# Altium PCB CPU_PCB.PcbDoc
Units mm, origin at the board's own origin, x right, y up, seen from the top; angles counter-clockwise.
Board outline 42 x 42 mm, 2 copper layers (Top Layer, Bottom Layer); 30 components, 38 nets, 169 pads, 39 vias.
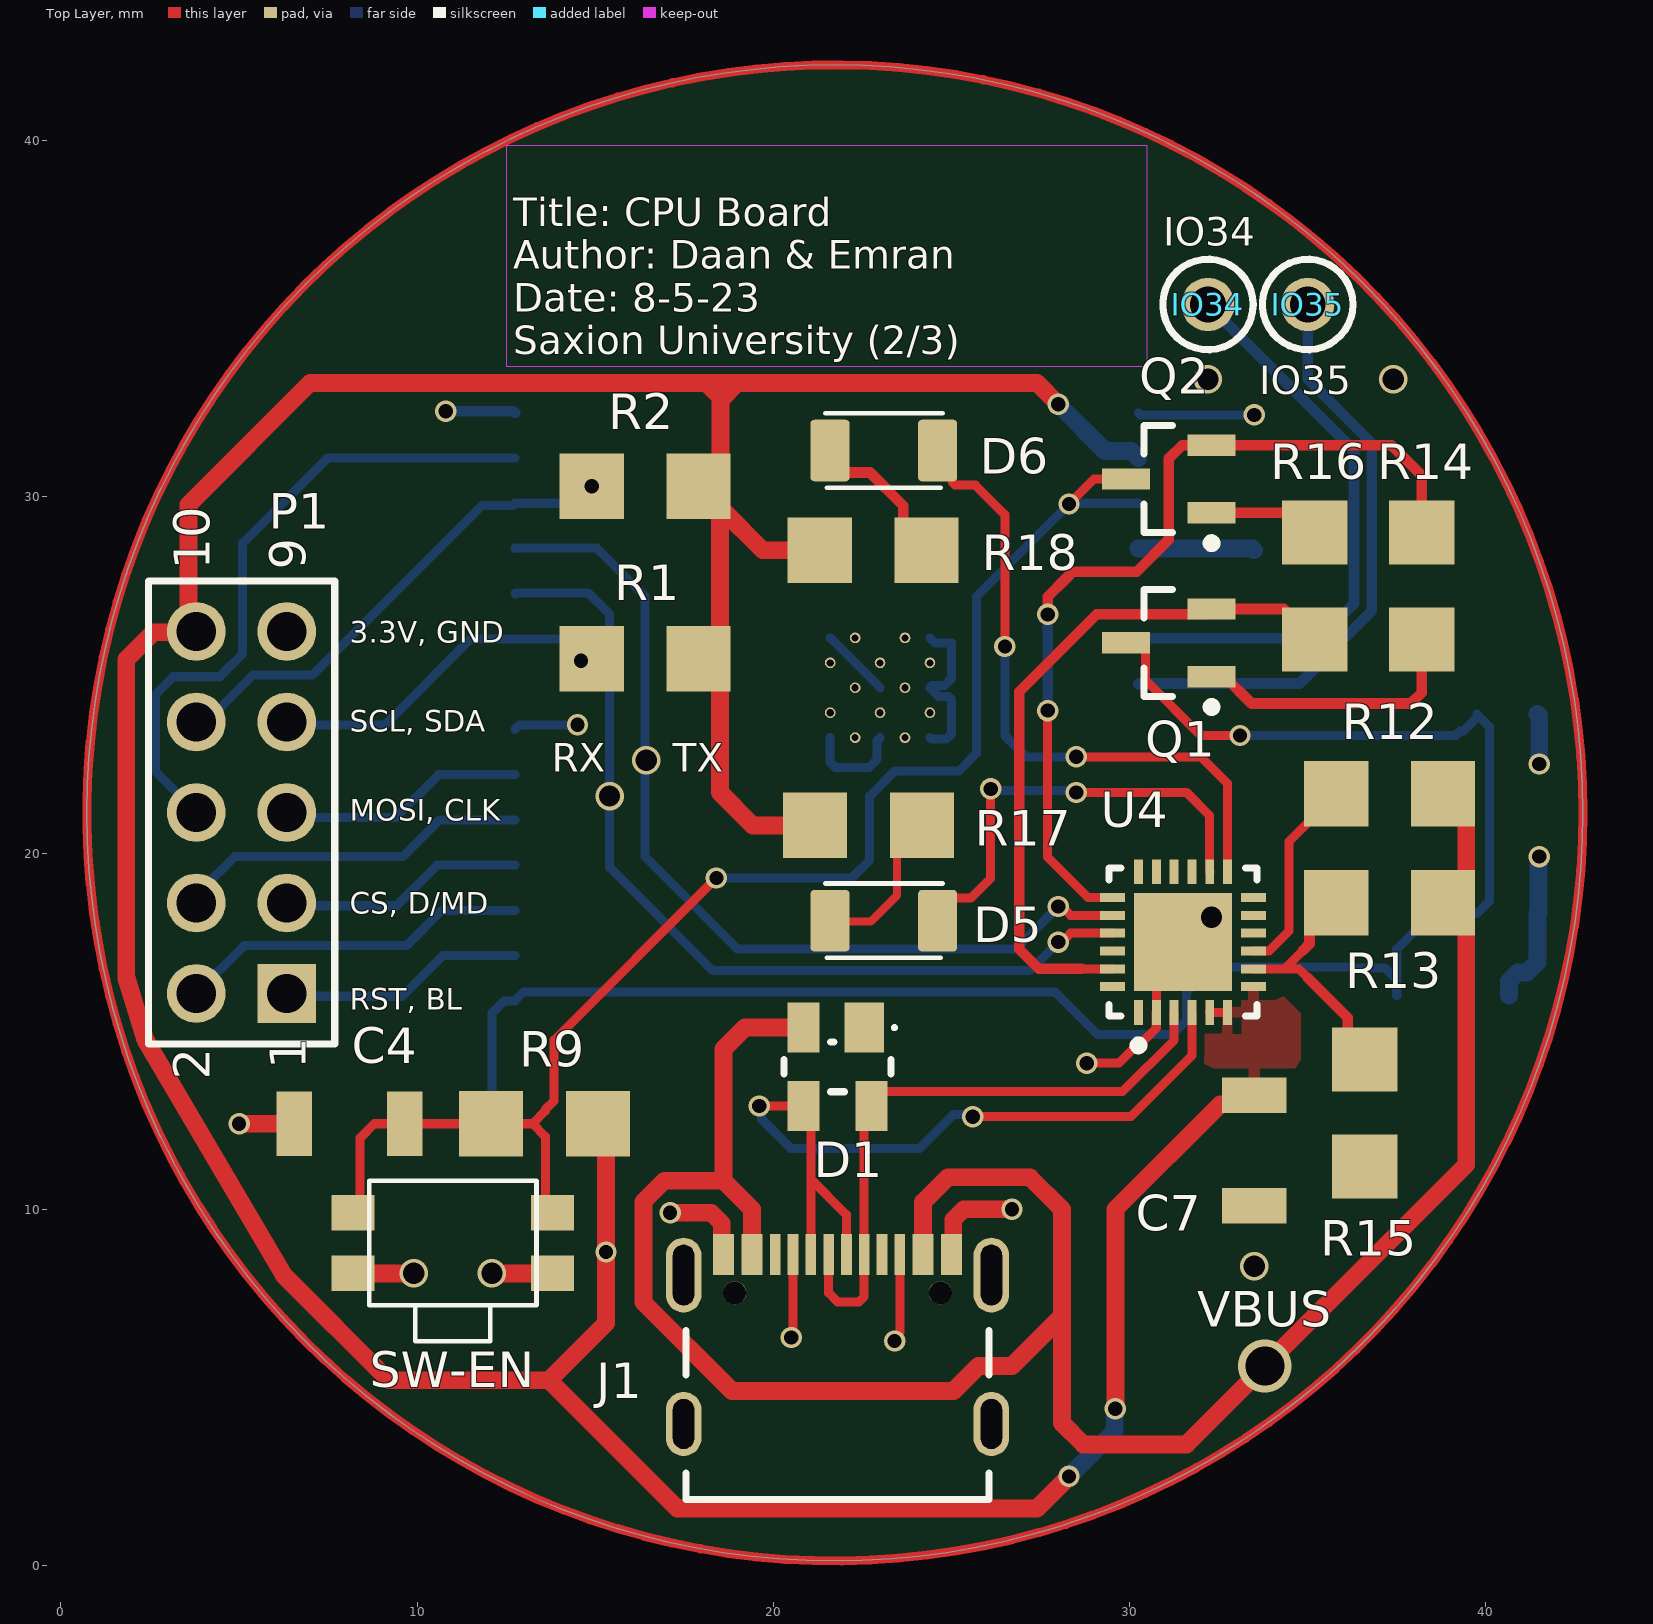
[diagram p0: Top Layer view]
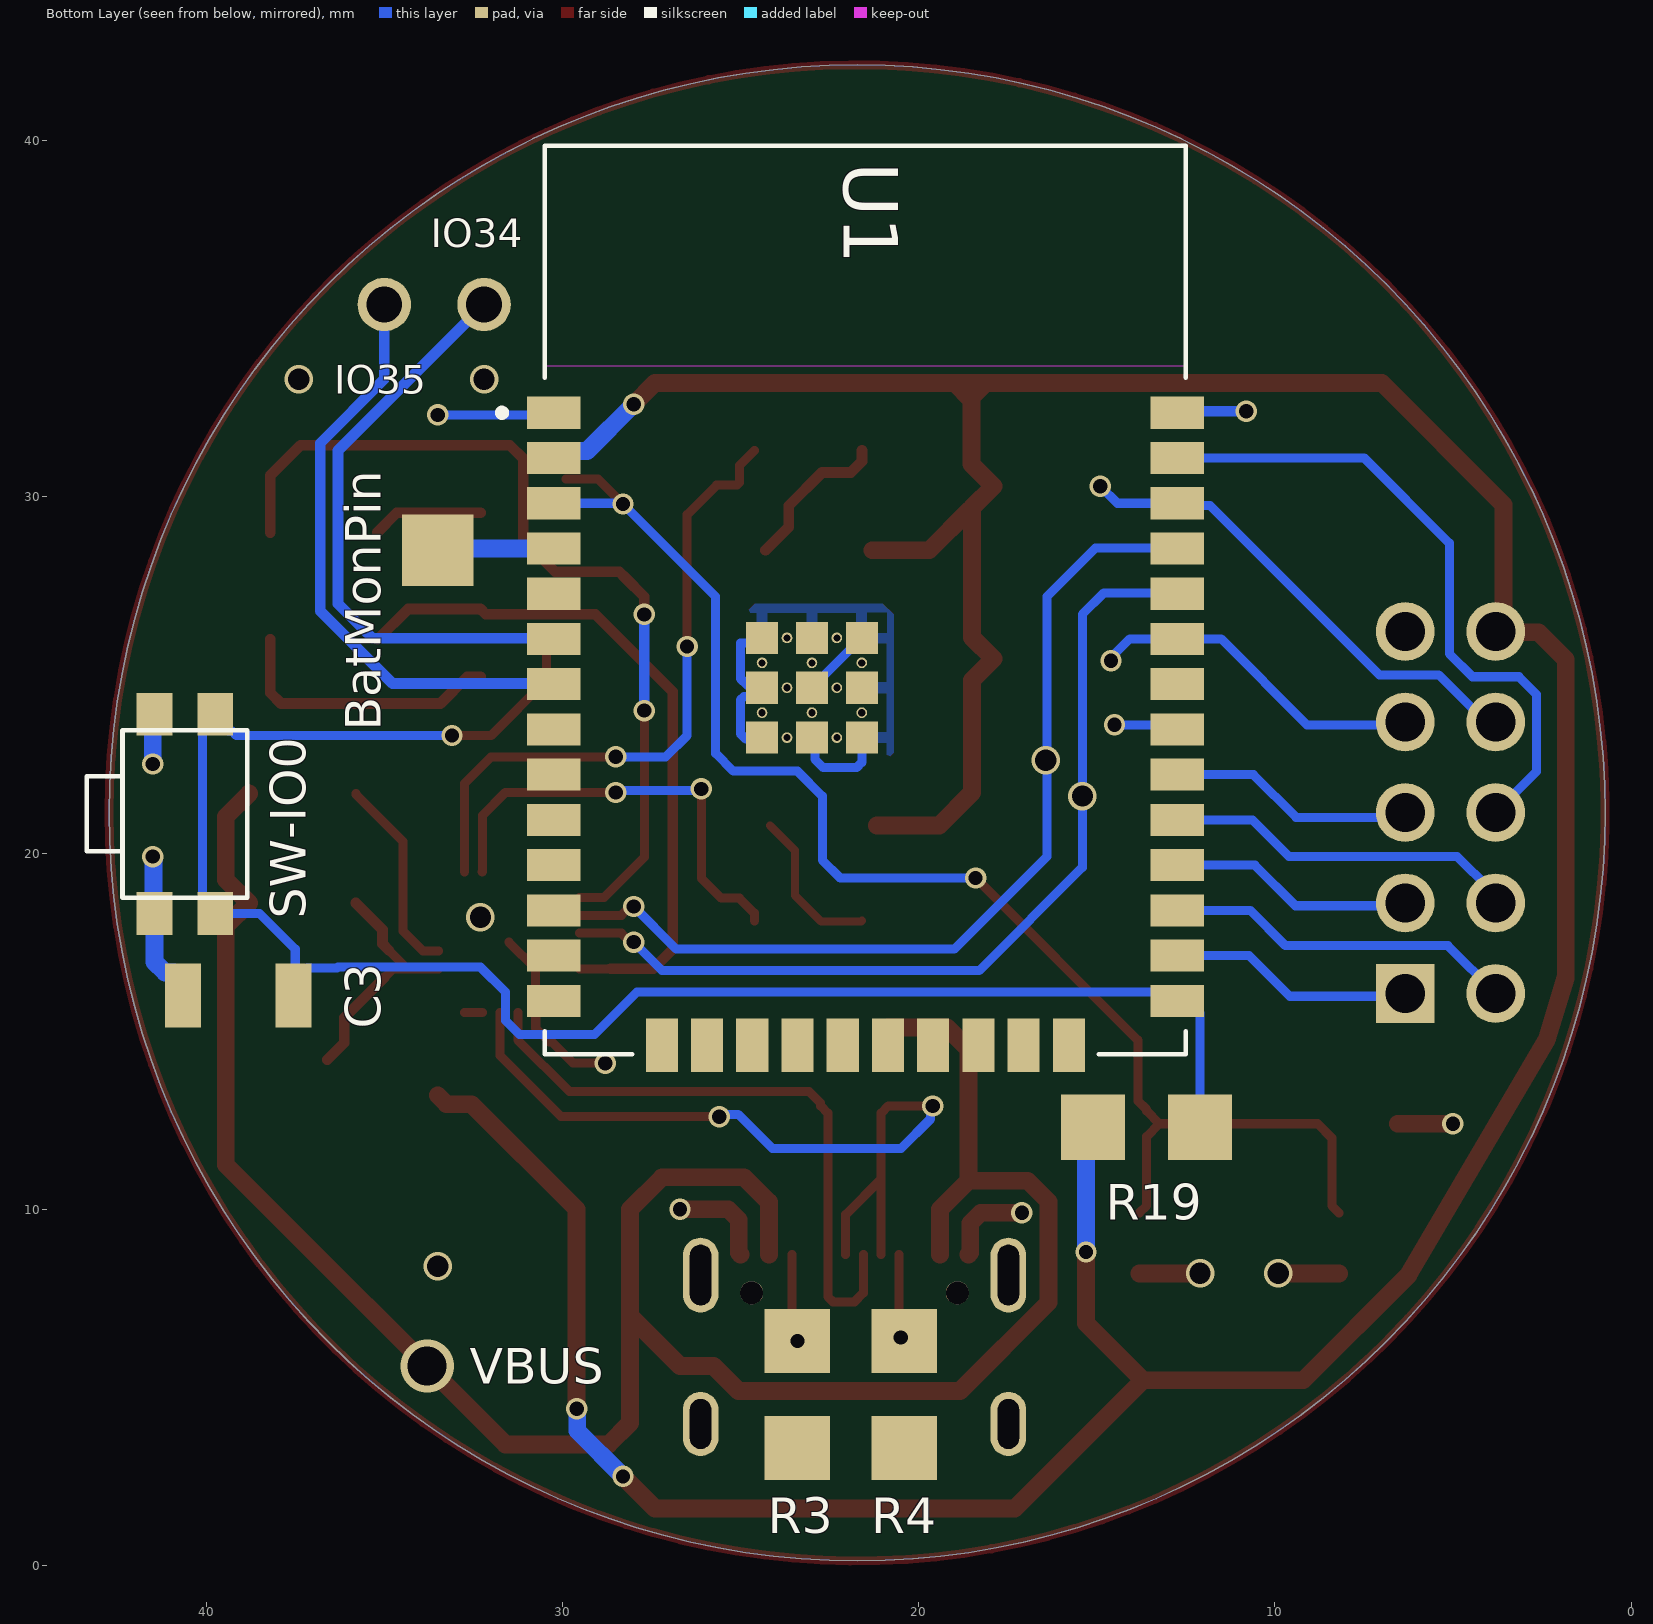
[diagram p1: Bottom Layer view, seen from below]
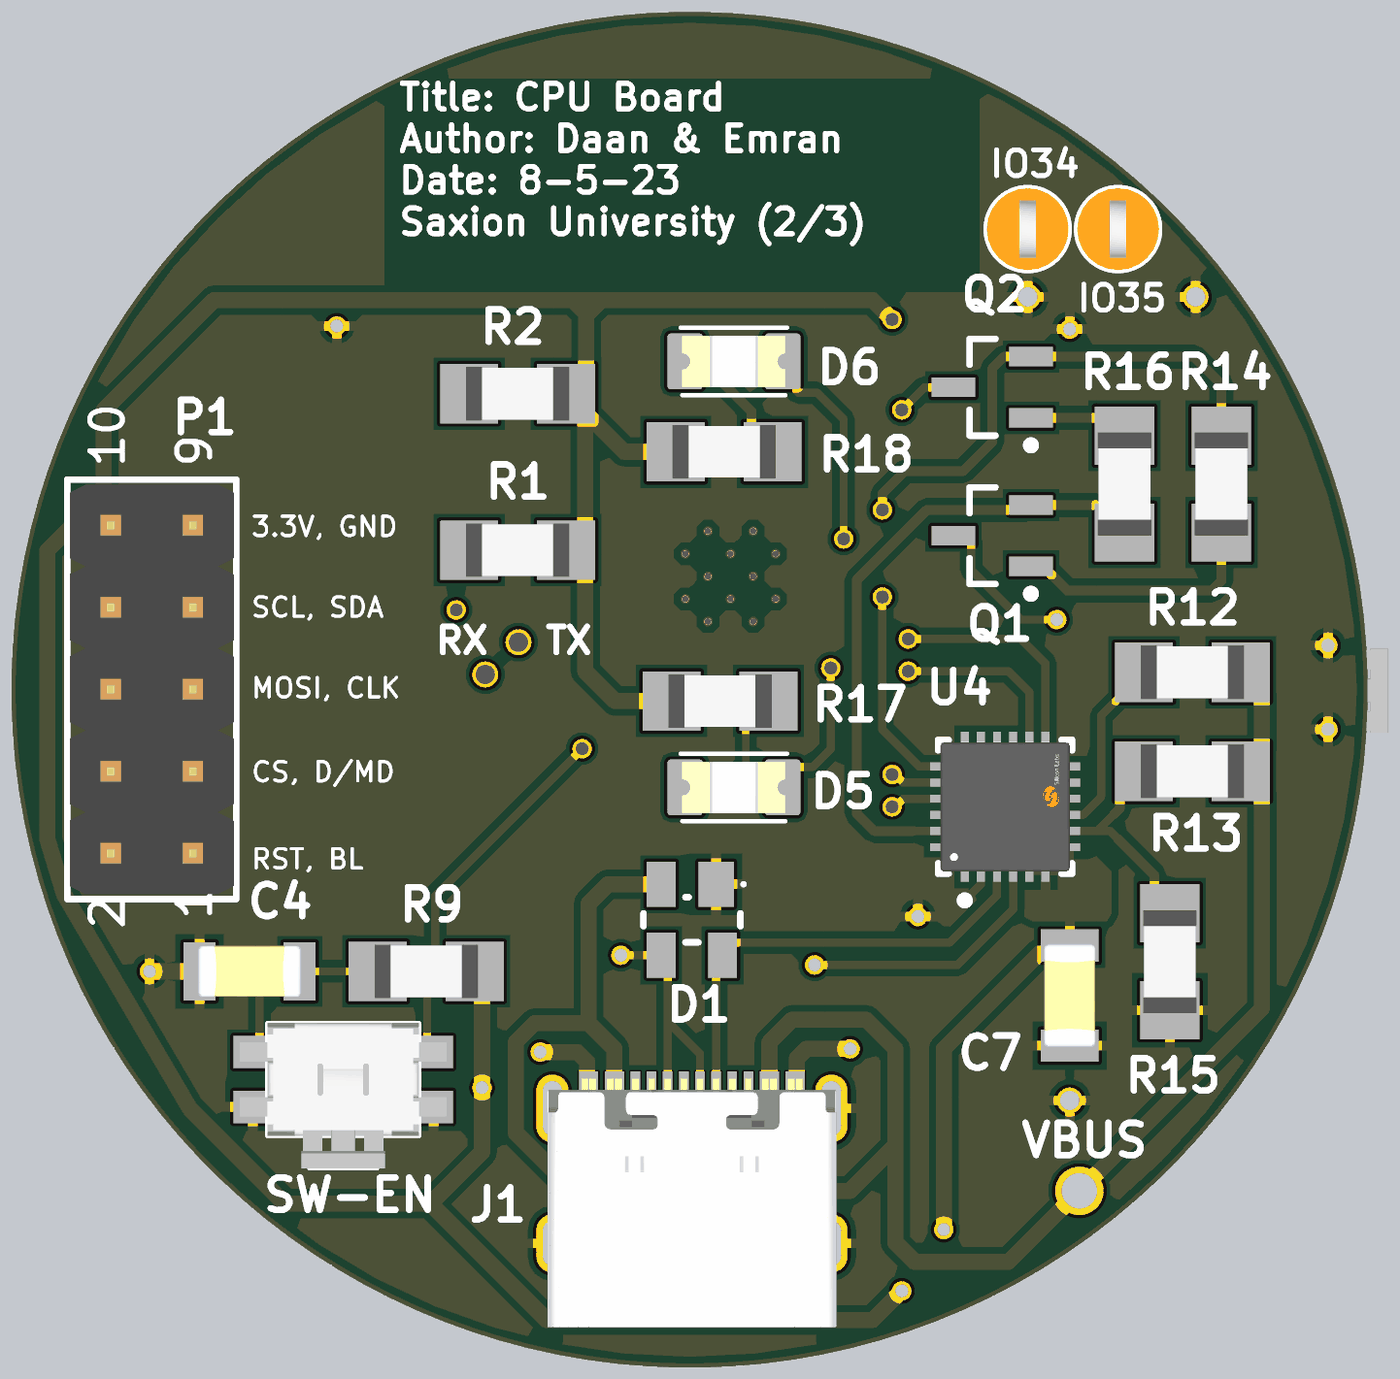
[diagram p2: 3D render of the assembled board from above, using the file's embedded part models]
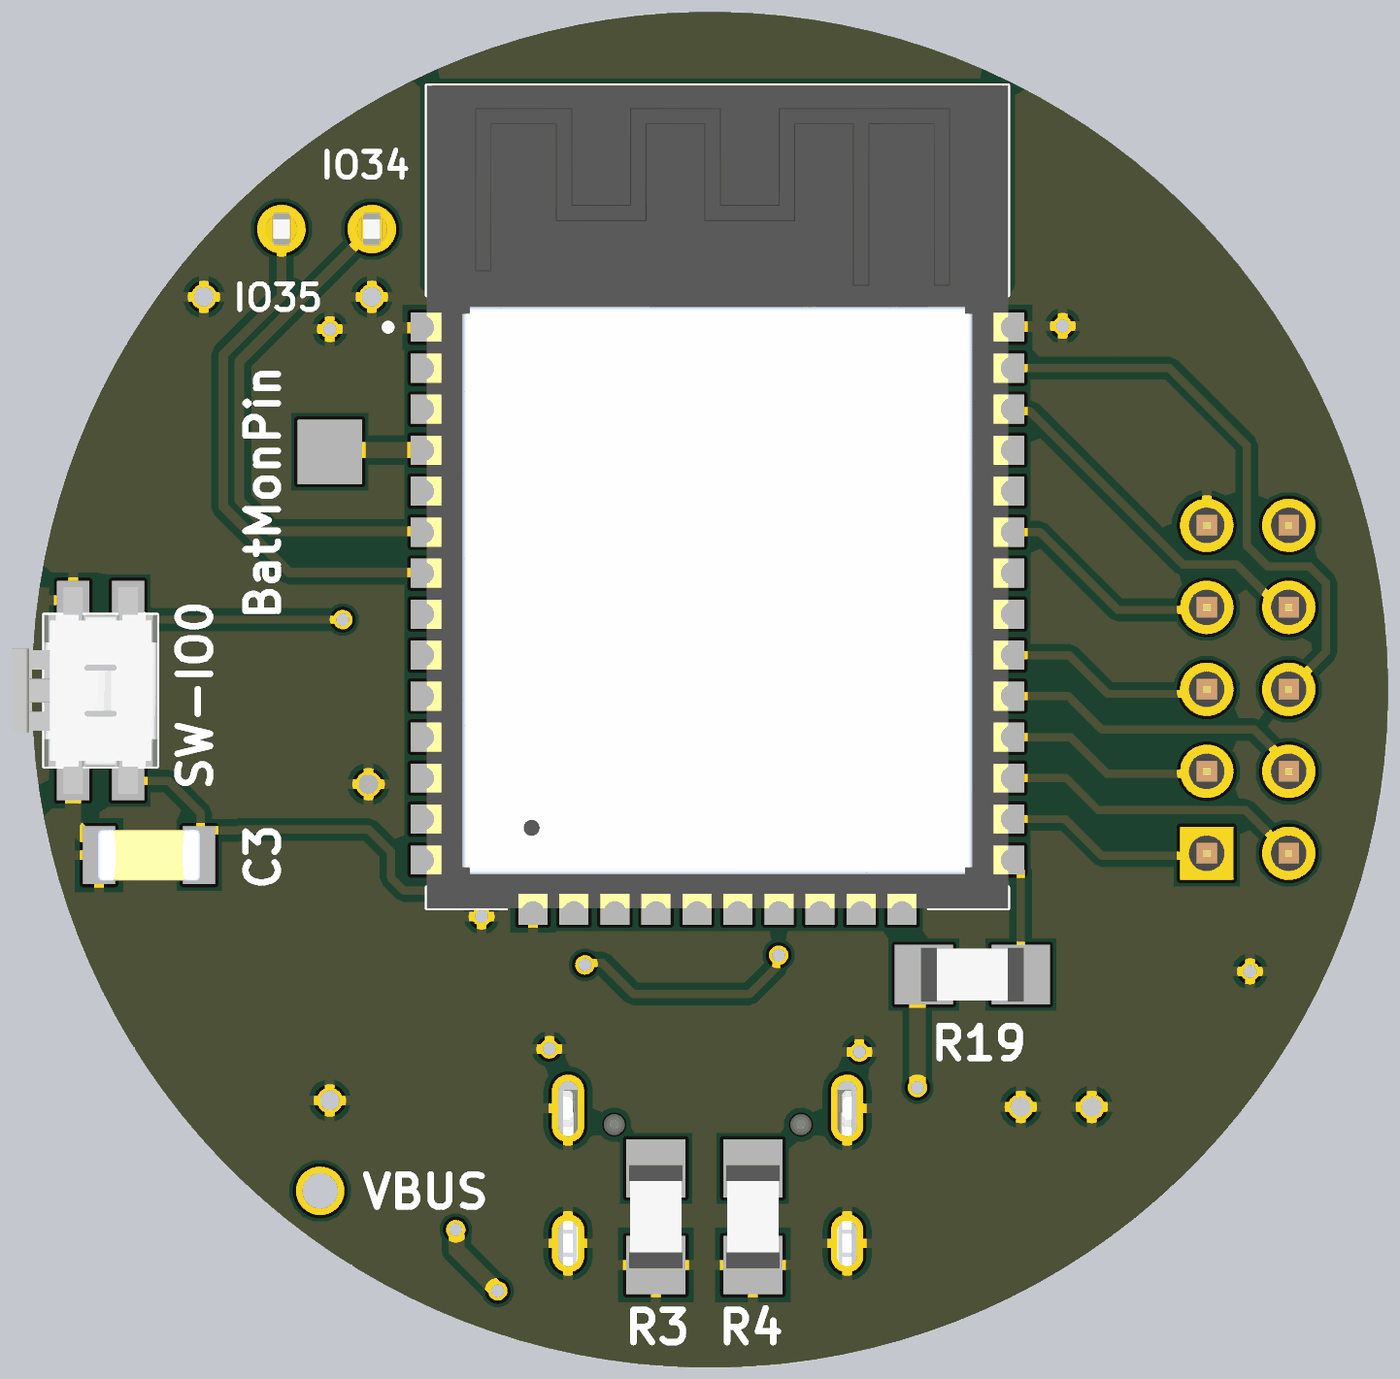
[diagram p3: 3D render of the assembled board from below, using the file's embedded part models]

## Layer stack, top to bottom
Top Solder: solder mask 0.0102, Solder Resist, Dk 3.5
Top Layer: signal copper 0.0356
Dielectric 1: dielectric 0.32, FR-4, Dk 4.8
Bottom Layer: signal copper 0.0356
Bottom Solder: solder mask 0.0102, Solder Resist, Dk 3.5

## Board outline
0.727,21.127 ccw(c21.727,21.127) 21.727,0.127 ccw(c21.727,21.127) 42.727,21.127 ccw(c21.727,21.127) 21.727,42.127 ccw(c21.727,21.127)

## Design rules (kind name [scope] priority, off if disabled: settings)
Clearance [All] p1: gap=0.2 ignorepadtopadclearanceinfootprint=TRUE
DiffPairsRouting [All] p1: maxlimit=0.254 minlimit=0.24 mostfreqgap=0.254 toplayer_minwidth=0.254 toplayer_maxwidth=0.381 toplayer_prefwidth=0.381 bottomlayer_minwidth=0.254 bottomlayer_maxwidth=0.381 bottomlayer_prefwidth=0.381 maxuncoupledlength=12.7
PlaneConnect [All] p1: planeconnectstyle=Direct reliefexpansion=0.508 reliefentries=4 reliefconductorwidth=0.254 reliefairgap=0.254
PolygonConnect [All] p1: connectstyle=Relief reliefconductorwidth=0.3 reliefentries=4 polygonreliefangle="90 Angle" airgapwidth=0.254
RoutingVias [All] p1: holewidth=0.5 width=1 viastyle="Through Hole" minholewidth=0.2 minwidth=0.5 maxholewidth=1 maxwidth=5
SolderMaskExpansion [All] p1: expansion=0.102 istentingtop=FALSE
Width [All] p1: maxlimit=0.5 minlimit=0.254 preferedwidth=0.3
28 further rules are at their usual default settings.

## Classes and differential pairs
component class CPU_Programmer_Schem: C7 D5 D6 Q1 Q2 R12 R13 R14 R15 R16 R17 R18 U4
component class CPUWroom_Schem: BatMonPin C3 C4 D1 IO34 IO35 J1 NoBat1 P1 R1 R2 R3 R4 R9 R19 SW-EN SW-IO0 U1
differential pair D_USB: +D_USB_P -D_USB_N

## Components (designator, comment, footprint, x,y, rotation, side; value= is the part's Value field where it differs from the comment)
BatMonPin "Pad" PAD_SQ_2MM 33.5,28.5 r90 bottom (schematic designator "Bat Mon Pin")
C3 "10n" CAP_1206 39.1,16 r180 bottom
C4 "10n" CAP_1206 8.1,12.4 r0 top
C7 "5u" CAP_1206 33.5,11.65 r90 top
D1 "SP0503BAHTG" LFUS-SOT143-4_V 21.8,14 r270 top
D5 "TX" LED_1206 23.1,18.1 r180 top
D6 "RX" LED_1206 23.1,31.3 r180 top
IO34 "5003" KSTN-5003 32.2,35.4 r90 top
IO35 "5003" KSTN-5003 35,35.4 r90 top
J1 "USB4105-GF-A-060" USB4105-GF-A-060 21.8,6.35 r0 top
P1 "61301021121" 61301021121 5.07,21.14 r90 top
Q1 "2N7002" INF-PG-SOT23_M 31.1,25.9 r180 top
Q2 "2N7002" INF-PG-SOT23_M 31.1,30.5 r180 top
R1 "2k2" RES_1206 16.4,25.454 r180 top
R2 "2k2" RES_1206 16.4,30.3 r180 top
R3 "5k1" RES_1206 23.402,4.8 r90 bottom
R4 "5k1" RES_1206 20.4,4.8 r90 bottom
R9 "10k" RES_1206 13.572,12.4 r180 top
R12 "4k7" RES_1206 37.3,21.667 r180 top
R13 "24k" RES_1206 37.3,18.6 r180 top
R14 "10k" RES_1206 38.2,27.5 r270 top
R15 "47k" RES_1206 36.6,12.7 r90 top
R16 "10k" RES_1206 35.2,27.5 r90 top
R17 "3k3" RES_1206 22.669,20.777 r0 top
R18 "3k3" RES_1206 22.8,28.5 r0 top
R19 "10k" RES_1206 13.6,12.3 r180 bottom
SW-EN "434331045822" 434331045822 11,9.05 r0 top
SW-IO0 "434331045822" 434331045822 40.6,21.1 r270 bottom
U1 "ESP32-WROOM-32E_(16MB)" XCVR_ESP32-WROOM-32E_(16MB) 21.495,27.1 r180 bottom
U4 "CP2104-F03-GMR" FP-CP2104-F03-GMR-MFG 31.5,17.5 r90 top

## Footprints (in the part's own frame and the unit in brackets; to place one, negate y for a bottom-side part, rotate by r counter-clockwise, add the part's x,y. Pads: shape width x height; smd on the part's side, far side on the other; paste and mask are expansions set on the pad)
61301021121 [mm] "Pin Header, pitch 2.54 mm, THT, Vertical, dual row, 10p"
  rect 1.65x1.65 hole 1.1: 1(-5.08,-1.27)
  round 1.65 hole 1.1: 2(-5.08,1.27) 3(-2.54,-1.27) 4(-2.54,1.27) 5(0,-1.27) 6(0,1.27) 7(2.54,-1.27) 8(2.54,1.27) 9(5.08,-1.27) 10(5.08,1.27)
  silkscreen extent -6.5,-2.62 6.5,2.62, body extent -6.35,-2.54 6.35,2.54, height 8.59
434331045822 [mm] "4.7*3.5mm side push type,SMD, height 1.65mm, black actuator, 220gf, T&R"
  rect 1.2x1 smd: 1(2.8,0.85) 2(2.8,-0.85) 3(-2.8,0.85) 4(-2.8,-0.85)
  silkscreen extent -2.35,-2.75 2.35,1.75, body extent -3.2,-2.75 3.2,1.75, height 1.65
CAP_1206 [mm]
  rect 1x1.8 smd: 1(-1.55,0) 2(1.55,0)
  body extent -1.6,-0.8 1.6,0.8, height 0.94
FP-CP2104-F03-GMR-MFG [mm]
  rect 0.7x0.25 smd paste+0 mask+0: 1(-1.975,1.25) 2(-1.975,0.75) 3(-1.975,0.25) 4(-1.975,-0.25) 5(-1.975,-0.75) 6(-1.975,-1.25) 13(1.975,-1.25) 14(1.975,-0.75) 15(1.975,-0.25) 16(1.975,0.25) 17(1.975,0.75) 18(1.975,1.25)
  rect 0.25x0.7 smd paste+0 mask+0: 7(-1.25,-1.975) 8(-0.75,-1.975) 9(-0.25,-1.975) 10(0.25,-1.975) 11(0.75,-1.975) 12(1.25,-1.975) 19(1.25,1.975) 20(0.75,1.975) 21(0.25,1.975) 22(-0.25,1.975) 23(-0.75,1.975) 24(-1.25,1.975)
  rect 2.75x2.75 smd paste-1000 mask+0: 25(0,0)
  silkscreen extent -3.02,-2.07 2.07,2.07, body extent -2.42,-2.42 2.42,2.42, height 0.25
INF-PG-SOT23_M [mm] "SOT23, 3-Leads, Body 2.9x1.3mm, Pitch 0.95mm, IPC Low Density"
  rect 1.35x0.6 smd: 1(-1.2,0.95) 2(-1.2,-0.95) 3(1.2,0)
  silkscreen extent -1.33,-1.5 0.7,1.92, body extent -0.7,-1.5 0.7,1.5, height 1.1
KSTN-5003 [mm] "Test Point, Through Hole, Dia 2.54mm"
  round 1.5 hole 1: 1(0,0)
  silkscreen extent -1.27,-1.27 1.27,1.27, body extent -1.27,-1.27 1.27,1.27, height 4.57
LED_1206 [mm]
  rrect20% 1.1x1.73 smd: A(1.51,0) C(-1.51,0)
  silkscreen extent -1.65,-1.04 1.65,1.04, body extent -1.6,-0.8 1.6,0.8, height 1.1
LFUS-SOT143-4_V [mm] "SOT143, 4-Leads, Body 3.04x1.4mm, Pitch 1.90mm"
  rect 1.4x1.1 smd: 1(-1.1,0.75)
  rect 1.4x0.9 smd: 2(-1.1,-0.95) 3(1.1,-0.95) 4(1.1,0.95)
  silkscreen extent -1.15,-1.5 0.7,1.65, body extent -0.7,-1.52 0.7,1.52, height 1.22
PAD_SQ_2MM [mm]
  rect 2x2 smd: 1(0,0)
RES_1206 [mm]
  rect 1.8x1.84 smd: 1(-1.5,0) 2(1.5,0)
  body extent -1.6,-0.83 1.6,0.83, height 0.57
USB4105-GF-A-060 [mm]
  rect 0.6x1.15 smd mask+0.05: A1B12(-3.2,2.378) A4B9(-2.4,2.378) B1A12(3.2,2.378) B4A9(2.4,2.378)
  rect 0.3x1.15 smd mask+0.05: A5(-1.25,2.378) A6(-0.25,2.378) A7(0.25,2.378) A8(1.25,2.378) B5(1.75,2.378) B6(0.75,2.378) B7(-0.75,2.378) B8(-1.75,2.378)
  round 0.65 hole 0.65 unplated mask+0.05: MH(-2.89,1.303) MH(2.89,1.303)
  oval 1x1.8 hole 0.6 slot 1.4 at 90 deg: SH(-4.32,-2.377) SH(4.32,-2.377)
  oval 1x2.1 hole 0.6 slot 1.7 at 90 deg: SH(-4.32,1.803) SH(4.32,1.803)
  silkscreen extent -4.25,-4.5 4.25,0.25, body extent -4.47,-4.97 4.47,2.73, height 3.27
XCVR_ESP32-WROOM-32E_(16MB) [mm]
  rect 1.5x0.9 smd: 1(-8.75,5.26) 2(-8.75,3.99) 3(-8.75,2.72) 4(-8.75,1.45) 5(-8.75,0.18) 6(-8.75,-1.09) 7(-8.75,-2.36) 8(-8.75,-3.63) 9(-8.75,-4.9) 10(-8.75,-6.17) 11(-8.75,-7.44) 12(-8.75,-8.71) 13(-8.75,-9.98) 14(-8.75,-11.25) 25(8.75,-11.25) 26(8.75,-9.98) 27(8.75,-8.71) 28(8.75,-7.44) 29(8.75,-6.17) 30(8.75,-4.9) 31(8.75,-3.63) 32(8.75,-2.36) 33(8.75,-1.09) 34(8.75,0.18) 35(8.75,1.45) 36(8.75,2.72) 37(8.75,3.99) 38(8.75,5.26)
  rect 0.9x1.5 smd: 15(-5.715,-12.5) 16(-4.445,-12.5) 17(-3.175,-12.5) 18(-1.905,-12.5) 19(-0.635,-12.5) 20(0.635,-12.5) 21(1.905,-12.5) 22(3.175,-12.5) 23(4.445,-12.5) 24(5.715,-12.5)
  rect 0.9x0.9 smd: 39_1(-2.9,-1.06) 39_2(-1.5,-1.06) 39_3(-0.1,-1.06) 39_4(-2.9,-2.46) 39_5(-1.5,-2.46) 39_6(-0.1,-2.46) 39_7(-2.9,-3.86) 39_8(-1.5,-3.86) 39_9(-0.1,-3.86)
  round 0.3 hole 0.2 mask+0: 39_10(-2.2,-1.06) 39_11(-0.8,-1.06) 39_12(-2.9,-1.76) 39_13(-1.5,-1.76) 39_14(-0.1,-1.76) 39_15(-2.2,-2.46) 39_16(-0.8,-2.46) 39_17(-2.9,-3.16) 39_18(-1.5,-3.16) 39_19(-0.1,-3.16) 39_20(-2.2,-3.86) 39_21(-0.8,-3.86)
  Keep-Out Layer region: 9,6.56 -9,6.56 -9,12.75 9,12.75
  silkscreen extent -10.3,-12.75 9,12.75, body extent -9,-12.75 9,12.75, height 3.25

## Part data
BatMonPin: library part PAD_SQ_2MM, "Test Point Square 2mm"
C3 C4 C7: library part CAP_1206_50V, "Capacitor SMD 1206 50V"
D1: library part CMP-2000-05191-1, "TVS Diode Array, 30 pF, 30 KV, -40 to 85 degC, 4-Pin SOT143, RoHS, Tape and Reel", Capacitance Value=30pF, Clamping Voltage=8V, Leakage Current=0.1uA, Manufacturer=Littelfuse, Operating Temp Range=-40Cto85C, Operating Temperature Classification=Industrial, Operating Temperature Max Deg. C=85C, Operating Temperature Min Deg. C=-40C, Package / Case=SOT-143, Reverse Stand-off Voltage=5.5(Min)V, Working Voltage=5.5V, Working Voltage (Max)=5.5V(Min), Clamping Voltage (Max)=8V, Configuration=Triple, Datasheet URL=https://datasheet.ciiva.com/15143/getdatasheetpartid-116020-15143550.pdf, Datasheet Version=Dec-13, Direction Type=Uni-Directional, Leakage Current (Max)=0.1uA, Manufacturer URL=http://www.littelfuse.com/, Mounting=SurfaceMount, Mounting Style=SurfaceMount, Number of Elements=3, Package Type=SOT-143, Packaging=TapeandReel, Pin Count=3+Tab, Polarity=Uni-Directional, Product Depth (mm)=1.4mm, Product Height (mm)=1.05mm, Product Length (mm)=3.04mm, Rad Hardened=No, Suppressor Type=TVS
D5 D6: library part "LED - 1206", "Yellow 587nm LED Indication - Discrete 2V 1206 _3216 Metric_", Package="1206 Lite-On", Availability=Unavailable, MF="Lite-On Inc.", MP=LTST-C230KSKT, Price=None, SnapEDA_Link=https://www.snapeda.com/parts/LTST-C230KSKT/Lite-On%20Inc./view-part/264912/?ref=snap
IO34 IO35: library part CMP-002-00037-2, "Test Point, Orange, Height 4.6 mm, Tail Length 3 mm, 1-Pin THD, RoHS", Colour=Orange, Manufacturer=Keystone, Package Description="1-Pin Through Hole Device, Dia 2.54 mm", Package Quantity=10, Case/Package=5003, Connector Type=TestPoint, Contact Material=Bronze, Contact Plating=Tin, Datasheet URL=http://keyelco.com/userAssets/file/M65p56.pdf, Datasheet Version=Jun-15, Diameter=2.54mm, Manufacturer URL=http://www.keyelco.com/, Mounting Technology=TH, Package Reference=5003, Packaging=Bulk, Pins=1, RoHS Compliant=True
J1: "USB Connector Type C SMT 12 Pin", Manufacturer=GCT, Manufacturer Part Number=USB4105-GF-A-060
P1: library part CMP-1502-01084-1, "THT Vertical Pin Header WR-PHD, Pitch 2.54 mm, Dual Row, 10 pins", Contact Resistance=20mOhm, Manufacturer="Wurth Elektronik", Operating Temperature=-40to105degC, Rated Current=3A, Withstanding Voltage=500VAC, Working Voltage=250VAC, Datasheet URL=https://katalog.we-online.de/em/datasheet/6130xx21121.pdf, Gender=Male, Manufacturer URL=http://www.we-online.de, Mounting Technology=THT, Orientation=Vertical, Package Reference=61301021121, Packaging=Bag, Part Number=61301021121, Pin Number=10, Pitch=2.54mm, Publisher=WurthElektronik, Row Number=Dual
Q1 Q2: library part CMP-1149-00026-1, "N-Channel OptiMOS Small-Signal-Transistor, 60 V VDS, 0.3 A ID, -55 to 150 degC, PG-SOT23, Reel, Green", Manufacturer=Infineon, ComponentLink1Description="Manufacturer URL", ComponentLink1URL=http://www.infineon.com/, ComponentLink2Description=Datasheet, ComponentLink2URL=http://www.infineon.com/dgdl/2N7002_Rev2.4.pdf?folderId=db3a3043156fd573011622e10b5c1f67&fileId=db3a304319bc939a0119c2a9461e79e6, ComponentLink3Description="Package Specification", ComponentLink3URL=http://www.infineon.com/dgdl/SOT23-Package_Overview.pdf?folderId=db3a30431936bc4b0119532290053c66&fileId=db3a30431936bc4b0119533468123c85, DatasheetVersion="Rev. 2.4", Green=TRUE, Halogen-free=TRUE, ID (max)="0.3Â A", IDpuls (max)="1.2Â A", Mounting Technology="Surface Mount", PackageDescription="3-Pin Small Outline Transistor Package, 2.9 x 1.3 mm Body, 0.95 mm Pitch", PackageReference=PG-SOT23, PackageVersion=Apr-08, Packing=Reel, PartNumber=2N7002, Ptot (max)="0.5Â W", QG="0.4Â nC", RDS (on) (max)="3,000 mOhm", RDS (on) (max) (@4.5V)="4,000 mOhm", RthJA (max)="250 K/W", VDS (max)="60 V", VGS(th) (max)="2.5Â V", VGS(th) (min)="1.5Â V"
R1 R2 R3 R4 R9 R12 R13 R14 R15 R16 R17 R18 R19: library part RES_1206, "Resistor SMD 1206"
SW-EN SW-IO0: library part CMP-1461-00001-1, "WS-TASU SMD Tact Switch 4.7X3.5 mm side push", Manufacturer="Wuerth Elektronik", ComponentLink1Description="Manufacturer URL", ComponentLink1URL=http://www.we-online.com, ComponentLink2Description=Datasheet, ComponentLink2URL=http://katalog.we-online.de/em/datasheet/434331045822.pdf, NoPins=04, PackageReference=434331045822, PartNumber=434331045822
U1: "Bluetooth, WiFi 802.11b/g/n, Bluetooth v4.2 +EDR, Class 1, 2 and 3 Transceiver Module 2.4GHz ~ 2.5GHz Integrated, Trace Surface Mount", Package=None, Availability="Not in stock", Check_prices=https://www.snapeda.com/parts/ESP32-WROOM-32E%20(16MB)/Espressif+Systems/view-part/?ref=eda, MF="Espressif Systems", MP="ESP32-WROOM-32E (16MB)", Price=None, SnapEDA_Link=https://www.snapeda.com/parts/ESP32-WROOM-32E%20(16MB)/Espressif+Systems/view-part/?ref=snap
U4: library part CMP-08107-000004-1, "IC SGL USB-TO-UART BRIDGE 24QFN", Ambient Temperature Range High=+125°C, Ambient Temperature Range Low=-55°C, Manufacturer="Silicon Laboratories", Max Supply Voltage=3.6V, Min Supply Voltage=1.8V, Nominal Supply Current=100-17000uA, Temperature="-40°C to +85°C", Temperature Range High=+85°C, Temperature Range Low=-40°C, Automotive=No, Category=IC, ComponentLink2Description=Datasheet, ComponentLink2URL=https://www.silabs.com/documents/public/data-sheets/cp2104.pdf, Device Class L1="Integrated Circuits (ICs)", Device Class L2="Interface ICs", Device Class L3=Controllers, Digikey Description="IC SGL USB-TO-UART BRIDGE 24QFN", Height=0.8mm, Interface=UART,USB, Ipc Land Pattern Name=QFN50P400X400X75-24, Lead Free=Yes, Manufacturer Part Number=CP2104-F03-GMR, Mouser Description="I/O Controller Interface IC USB to UART bridge", Octopart=https://octopart.com/cp2104-f03-gmr-silicon+labs-19668642, Package=CP2104-F03-GMR, RoHS=TRUE, Standoff Height=0mm

## Via types
v1: diameter 0.6, hole 0.4, Top Layer to Bottom Layer, 30 vias
v2: diameter 0.8, hole 0.6, Top Layer to Bottom Layer, 8 vias
v3: diameter 1.5, hole 1.1, Top Layer to Bottom Layer, 1 vias

## Nets (pads, with @x,y where several pads share a name; then routed paths per layer and width w, separated by ;. In a path a pad name is that pad's centre, name@x,y a point inside that pad or via, vN(x,y) a via of type N, cw(c..) or ccw(c..) an arc to the next point about the centre after c; other vN are vias at no path point)
3.3V: C7.2 P1.10 R1.1 R2.1 R9.1 R17.1 R18.1 R19.1 U1.2 U4.5 U4.6 U4.7 | length 123.5
  Top Layer w0.254: U4.5 U4.6
  Top Layer w0.5: R9.1 15.3,12.172 v1(15.3,8.8) 15.3,6.8 13.7,5.2 ; R17.1 19.423,20.777 18.5,21.7 18.5,24.854 R1.1 18.5,26.054 R2.1@18.5,29.7 ; R18.1 19.7,28.5 18.57,29.63 18.55,29.63 18.5,29.68 R2.1@18.5,29.7 ; v1(28,32.6) 27.4,33.2 19,33.2 ; v1(28.3,2.5) 27.4,1.6 17.3,1.6 13.7,5.2 ; v1(29.6,4.4) 29.6,10 32.55,12.95 33.25,12.95 C7.2 ; 13.7,5.2 9.2,5.2 6.248,8.152 2.356,14.786 1.833,16.508 1.833,25.433 2.596,26.196 3.776,26.196 P1.10 3.58,26.44 3.58,29.78 7,33.2 18.1,33.2 ; 18.1,33.2 19,33.2 ; 18.1,33.2 18.52,32.78 18.52,32.72 ; R2.1@18.5,29.7 R2.1 18.52,30.92 18.52,32.72 ; 18.52,32.72 19,33.2
  Bottom Layer w0.5: R19.1 15.3,12.1 v1(15.3,8.8) ; v1(28,32.6) 29.31,31.29 30.045,31.29 U1.2 ; v1(28.3,2.5) 29.581,3.781 29.581,4.381 v1(29.6,4.4)
"CLK (2)": P1.5 U1.30 | length 7
  Bottom Layer w0.254: P1.5 6.48,21 9.4,21 10.6,22.2 U1.30
D_USB_N: D1.3 J1.A7 J1.B7 U4.4 | length 23.2
  Top Layer w0.254: v1(19.6,12.9) D1.3 21.05,12.7 21.05,10.85 ; J1.B7 21.05,10.85 ; J1.A7 22.05,9.85 21.05,10.85 ; v1(25.6,12.6) 30.037,12.6 31.75,14.313 U4.4
  Bottom Layer w0.254: v1(19.6,12.9) 19.666,12.834 19.666,12.534 20.5,11.7 24.1,11.7 25.066,12.666 25.534,12.666 v1(25.6,12.6)
D_USB_P: D1.4 J1.A6 J1.B6 U4.3 | length 17.8
  Top Layer w0.254: J1.A6 21.55,7.65 21.8,7.4 22.404,7.4 22.55,7.546 J1.B6 22.55,12.7 D1.4 22.75,12.977 23.073,13.3 29.8,13.3 31.25,14.75 U4.3
DTR: Q1.2 R16.1 U4.23 | length 19.7
  Top Layer w0.254: 28.65,16.75 U4.23
  Top Layer w0.3: 28.65,16.75 27.45,16.75 26.9,17.3 26.9,24.524 27.55,25.174 29.076,26.7 32.15,26.7 Q1.2 34.33,26.85 35.18,26 R16.1
EN: C4.2 Q2.3 R9.2 SW-EN.1 SW-EN.3 U1.3 | length 40.7
  Top Layer w0.254: SW-EN.3 8.4,10.1 8.4,12 8.8,12.4 C4.2 R9.2 ; R9.2 13.24,12.4 ; SW-EN.1 13.6,10.1 13.6,12.041 13.24,12.4 ; v1(18.4,19.3) 13.845,14.745 13.845,13.045 13.6,12.8 13.6,12.76 13.24,12.4 ; v1(28.3,29.8) 29,30.5 Q2.3
  Bottom Layer w0.254: v1(18.4,19.3) 22.2,19.3 22.7,19.8 22.7,21.6 23.4,22.3 25.2,22.3 25.7,22.8 25.7,27.2 v1(28.3,29.8) 28.32,29.82 U1.3
GND: C3.1 C4.1 C7.1 D1.1 J1.A1B12 J1.B1A12 J1.SH P1.9 R3.1 R4.1 R15.1 SW-EN.2 SW-EN.4 SW-IO0.2 SW-IO0.4 U1.1 U1.15 U1.38 U1.39_1 U1.39_2 U1.39_3 U1.39_4 U1.39_5 U1.39_6 U1.39_7 U1.39_8 U1.39_9 U4.2 U4.25 | length 35.9
  Top Layer w0.254: v1(28.8,14.1) 29.7,14.1 30.3,14.7 30.362,14.7 30.748,15.086 30.748,15.523 U4.2 30.75,16.75 U4.25
  Top Layer w0.5: v1(5,12.4) C4.1 ; SW-EN.4 v2(9.9,8.2) ; v2(12.1,8.2) SW-EN.2 ; v1(17.1,9.9) 18.257,9.9 18.55,9.607 18.55,8.778 J1.A1B12 ; J1.B1A12 25.05,8.778 25.05,9.707 25.343,10 v1(26.7,10)
  Bottom Layer w0.254: U1.39_9 21.595,22.549 21.744,22.4 22.677,22.4 22.913,22.636 22.913,23.158 U1.39_8 ; U1.39_3 U1.39_5 ; U1.39_7 24.435,23.2 24.851,23.2 25,23.349 25,24.3 24.9,24.4 24.635,24.4 U1.39_4 24.455,24.7 24.8,24.7 25,24.9 25,25.891 24.544,25.891 U1.39_1 ; U1.1 30.305,32.3 v1(33.5,32.3)
  Bottom Layer w0.3: v1(10.8,32.4) 12.705,32.4 U1.38
  Bottom Layer w0.5: C3.1 40.65,16.4 40.9,16.65 41.157,16.65 41.45,16.943 SW-IO0.2 41.481,18.331 41.481,19.881 v1(41.5,19.9) ; SW-IO0.4 41.5,23.85 v1(41.5,22.5)
  other v2: 33.5,8.4 32.3,18.2 32.2,33.3 37.4,33.3
IO0: C3.2 Q1.3 R19.2 SW-IO0.1 SW-IO0.3 U1.25 | length 52.3
  Top Layer w0.254: Q1.3 30.275,25.9 30.448,25.727 30.448,24.852 32,23.3 v1(33.1,23.3)
  Bottom Layer w0.254: R19.2 12.1,15.505 12.445,15.85 U1.25 12.995,16.1 27.9,16.1 29.1,14.9 31.2,14.9 31.6,15.3 31.6,16.1 32.3,16.8 36.3,16.8 36.327,16.773 37.177,16.773 C3.2@37.5,16.45 ; v1(33.1,23.3) 39.15,23.3 39.277,23.427 39.377,23.427 39.75,23.8 SW-IO0.3 40.1,23.55 40.1,18.65 SW-IO0.1 38.5,18.3 37.5,17.3 C3.2@37.5,16.45 ; C3.2@37.5,16 C3.2@37.5,16.45
IO2: U1.24
"IO4, BL(6)": P1.1 U1.26 | length 6.9
  Bottom Layer w0.254: P1.1 6.42,15.98 9.58,15.98 10.72,17.12 U1.26
"IO5, CS(3)": P1.4 U1.29 | length 10.1
  Bottom Layer w0.254: P1.4 3.8,18.978 3.957,18.978 4.88,19.9 9.6,19.9 10.63,20.93 U1.29
IO12: U1.14
IO13: U1.16
IO14: U1.13
IO15: U1.23
"IO16, RST(5)": P1.2 U1.27 | length 9.9
  Bottom Layer w0.254: P1.2 5.14,17.4 9.7,17.4 10.69,18.39 U1.27
"IO17, D/MD(4)": P1.3 U1.28 | length 6.9
  Bottom Layer w0.254: P1.3 6.42,18.52 9.42,18.52 10.56,19.66 U1.28
IO34: IO34.1 U1.6 | length 16.6
  Bottom Layer w0.3: U1.6 30.265,26.03 35.33,26.03 36.3,27 36.3,31.3 IO34.1
IO35: IO35.1 U1.7 | length 16.8
  Bottom Layer w0.3: U1.7 30.265,24.76 34.767,24.76 36.8,26.793 36.8,31.507 35,33.307 IO35.1
MISO: U1.31 | length 1.8
  Bottom Layer w0.254: U1.31 12.875,23.6 v1(14.5,23.6)
"MOSI (1)": P1.6 U1.37 | length 18.4
  Bottom Layer w0.254: P1.6 2.648,22.292 2.648,24.448 3.15,24.95 4.45,24.95 5.1,25.6 5.1,28.7 7.49,31.09 U1.37
NetBatMonPin_1: BatMonPin.1 U1.4 | length 3.3
  Bottom Layer w0.5: U1.4 33.45,28.55 BatMonPin.1
NetD5_A: D5.A R17.2 | length 4.4
  Top Layer w0.23: D5.A 21.613,18.077 21.659,18.077 22.734,18.077 23.469,18.812 23.469,20.077 R17.2
NetD6_A: D6.A R18.2 | length 4.4
  Top Layer w0.3: D6.A 21.59,31 21.646,30.944 21.904,30.686 22.714,30.686 23.648,29.752 23.648,29.152 R18.2
NetJ1_A5: J1.A5 R4.2 | length 2.3
  Top Layer w0.254: v1(20.5,6.4) 20.55,6.45 J1.A5
NetJ1_B5: J1.B5 R3.2 | length 2.5
  Top Layer w0.254: v1(23.402,6.3) 23.402,6.394 23.55,6.542 J1.B5
NetQ1_1: Q1.1 R14.2 | length 7.8
  Top Layer w0.3: Q1.1 32.675,24.95 33.425,24.2 37.9,24.2 38.2,24.5 R14.2
NetQ2_1: Q2.1 R16.2 | length 3.1
  Top Layer w0.3: Q2.1 34.65,29.55 R16.2
NetR12_2: R12.2 U4.9 | length 5.6
  Top Layer w0.254: U4.9 33.477,17.252 33.914,17.252 34.471,17.808 34.471,20.318 35.8,21.647 R12.2
NetR13_2: R13.2 R15.2 U4.8 | length 7
  Top Layer w0.254: U4.8 34.35,16.75 ; 34.875,17.275 34.35,16.75 ; 35,16.5 34.75,16.75 34.35,16.75
  Top Layer w0.3: 34.875,17.275 35.05,17.45 35.05,17.85 R13.2 ; 35,16.5 36.126,15.374 36.126,14.674 R15.2
RTS: Q2.2 R14.1 U4.19 | length 25.1
  Top Layer w0.254: v1(27.7,24) 27.7,19.887 28.837,18.75 U4.19
  Top Layer w0.3: v1@27.7,26.703 27.7,27.196 28.229,27.724 28.404,27.9 30.2,27.9 31.1,28.8 31.1,31.074 31.476,31.45 Q2.2 37.35,31.45 38.2,30.6 R14.1
  Bottom Layer w0.3: v1(27.7,24) v1(27.7,26.7)
RX_D: U1.34 U4.21 | length 25.8
  Top Layer w0.254: v1(28,17.5) 28.094,17.5 28.344,17.75 U4.21
  Bottom Layer w0.254: U1.34 12.765,27.3 14.8,27.3 15.4,26.7 v2(15.4,21.6) 15.4,19.6 18.3,16.7 27.2,16.7 v1(28,17.5)
RX_Led: D6.C U4.13 | length 18.4
  Top Layer w0.254: D6.C 25.033,30.877 25.033,30.399 25.102,30.329 25.671,30.329 26.5,29.5 v1(26.5,25.8) ; v1(28.5,22.7) 32,22.7 32.75,21.95 U4.13
  Bottom Layer w0.254: v1(26.5,25.8) 26.5,23.3 27.1,22.7 v1(28.5,22.7)
SCL: P1.8 R2.2 U1.36 | length 13.8
  Bottom Layer w0.254: P1.8 4.08,23.68 5.4,25 7.066,25 11.818,29.752 12.677,29.752 U1.36 12.8,29.82 14.417,29.82 14.897,30.3 v1(14.9,30.3)
SDA: P1.7 R1.2 U1.33 | length 9.6
  Bottom Layer w0.254: P1.7 6.42,23.6 9.1,23.6 11.51,26.01 U1.33 U1.33@12.8,26.01 ; U1.33@12.82,26.01 14.067,26.01 14.6,25.477 v1(14.6,25.4)
TX_D: U1.35 U4.20 | length 26.3
  Top Layer w0.254: v1(28,18.5) 28.094,18.5 28.344,18.25 U4.20
  Bottom Layer w0.254: U1.35 12.765,28.57 15.03,28.57 16.4,27.2 16.4,22.627 v2(16.427,22.6) ; v2@16.4,22.6 16.4,19.9 19,17.3 26.8,17.3 v1(28,18.5)
TX_Led: D5.C U4.14 | length 12.7
  Top Layer w0.254: D5.C 24.61,18.311 25.033,18.734 25.541,18.734 26.1,19.293 v1(26.1,21.8) ; v1(28.5,21.7) 31.6,21.7 32.248,21.052 32.248,19.477 U4.14
  Bottom Layer w0.254: v1(26.1,21.8) 26.15,21.75 28.45,21.75 v1(28.5,21.7)
VBUS: D1.2 J1.A4B9 J1.B4A9 R12.1 R13.1 | length 65.7
  Top Layer w0.5: J1.A4B9 19.4,10 18.6,10.8 ; D1.2@20.843,15.107 D1.2 19.2,15.1 18.6,14.5 18.6,10.8 ; J1.B4A9 24.2,10.2 24.9,10.9 27.2,10.9 28.1,10 28.1,7 ; R12.1 39.45,21.017 39.45,19.25 R13.1 39.45,17.95 39.45,11.25 31.6,3.4 28.7,3.4 28.1,4 28.1,7 ; 18.6,10.8 16.939,10.8 16.35,10.211 16.35,7.389 18.839,4.9 25.056,4.9 25.756,5.6 26.7,5.6 28.1,7
  other v3: 33.8,5.6
pads on no net: J1.A8 J1.B8 J1.MH U1.5 U1.8 U1.9 U1.10 U1.11 U1.12 U1.17 U1.18 U1.19 U1.20 U1.21 U1.22 U1.32 U1.39_10 U1.39_11 U1.39_12 U1.39_13 U1.39_14 U1.39_15 U1.39_16 U1.39_17 U1.39_18 U1.39_19 U1.39_20 U1.39_21 U4.1 U4.10 U4.11 U4.12 U4.15 U4.16 U4.17 U4.18 U4.22 U4.24
copper on no net: | length 131.9
  Top Layer w0.254: 42.727,21.127 ccw(c21.727,21.127) 42.727,21.127

## Polygon pours and split planes (outlines as drawn)
GND on Top Layer "NONET_L01_P002" (solid, shelved, pour order 2): 0.727,21.127 ccw(c21.727,21.127) 21.727,0.127 ccw(c21.727,21.127) 42.727,21.127 ccw(c21.727,21.127) 21.727,42.127 ccw(c21.727,21.127)
3.3V on Top Layer "NONET_L02_P-001" (solid, pour order 1): 32.1,12.8 32.4,12.5 34.6,12.5 34.8,12.7 34.8,15.5 33.9,16.4 33.2,16.4 33.1,16.3 33.1,16 33,15.9 32.2,15.9 32.1,15.8
GND on Bottom Layer "NONET_L02_P-001" (solid, pour order 4): 21,27 20.7,26.7 20.7,22.814 20.891,22.636 24.936,22.636 25.1,22.8 25.1,26.5 24.6,27
GND on Bottom Layer "NONET_L02_P003" (solid, shelved, pour order 3): 0.727,21.127 ccw(c21.727,21.127) 21.727,0.127 ccw(c21.727,21.127) 42.727,21.127 ccw(c21.727,21.127) 21.727,42.127 ccw(c21.727,21.127)

## Silkscreen, mask and mechanical layers (free items; w line width, h text height)
Top Overlay:
  text "IO34" at 30.95,37.05 h0.8
  text "Title: CPU Board / Author: Daan & Emran / Date: 8-5-23 / Saxion University (2/3)" at 12.7,34 h0.8
  text "IO35" at 33.646,32.882 h0.8
  text "3.3V, GND" at 8.1,25.9 h0.6
  text "SCL, SDA" at 8.1,23.4 h0.6
  text "RX" at 13.78,22.28 h0.8
  text "TX" at 17.18,22.28 h0.8
  text "MOSI, CLK" at 8.1,20.9 h0.6
  text "CS, D/MD" at 8.1,18.3 h0.6
  text "RST, BL" at 8.1,15.6 h0.6
  text "VBUS" at 31.9,6.7 h1
Bottom Overlay:
  text "VBUS" at 32.6,5.1 h1

## Text inside footprints (layer, text, board x,y; h text height)
P1: Top Overlay "9" at 6.87,27.95 h1.02 r90; Top Overlay "10" at 4.17,27.95 h1.02 r90; Top Overlay "1" at 6.87,13.93 h1.02 r90; Top Overlay "2" at 4.17,13.63 h1.02 r90
U1: Mechanical 13 "ANTENNA" at 27.495,36.1 h1.78